# Altium PCB 遥控.PcbDoc
Units mil, origin at the board's own origin, x right, y up, seen from the top; angles counter-clockwise.
Board outline 1860.24 x 2647.64 mil, 2 copper layers (Top Layer, Bottom Layer); 26 components, 16 nets, 80 pads, 4 vias.
Unrouted connection lines stored in the file: 18.
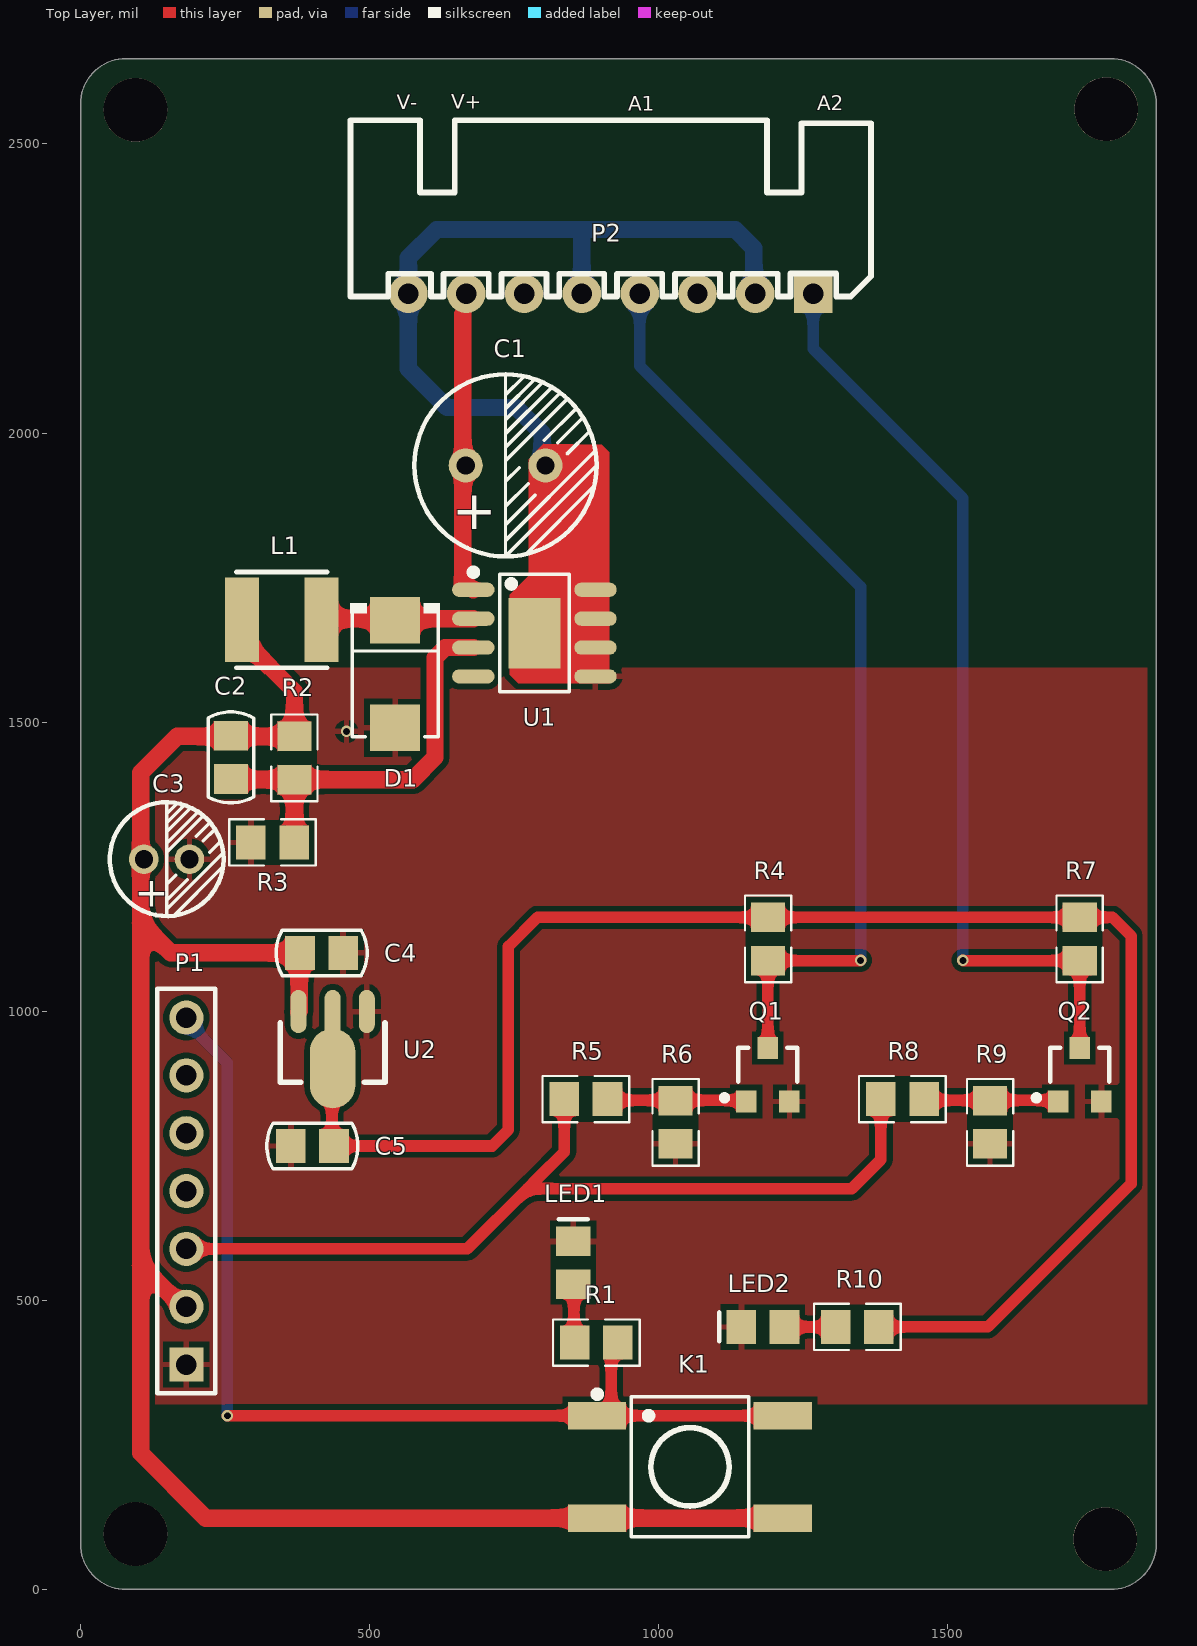
[diagram p0: Top Layer view]
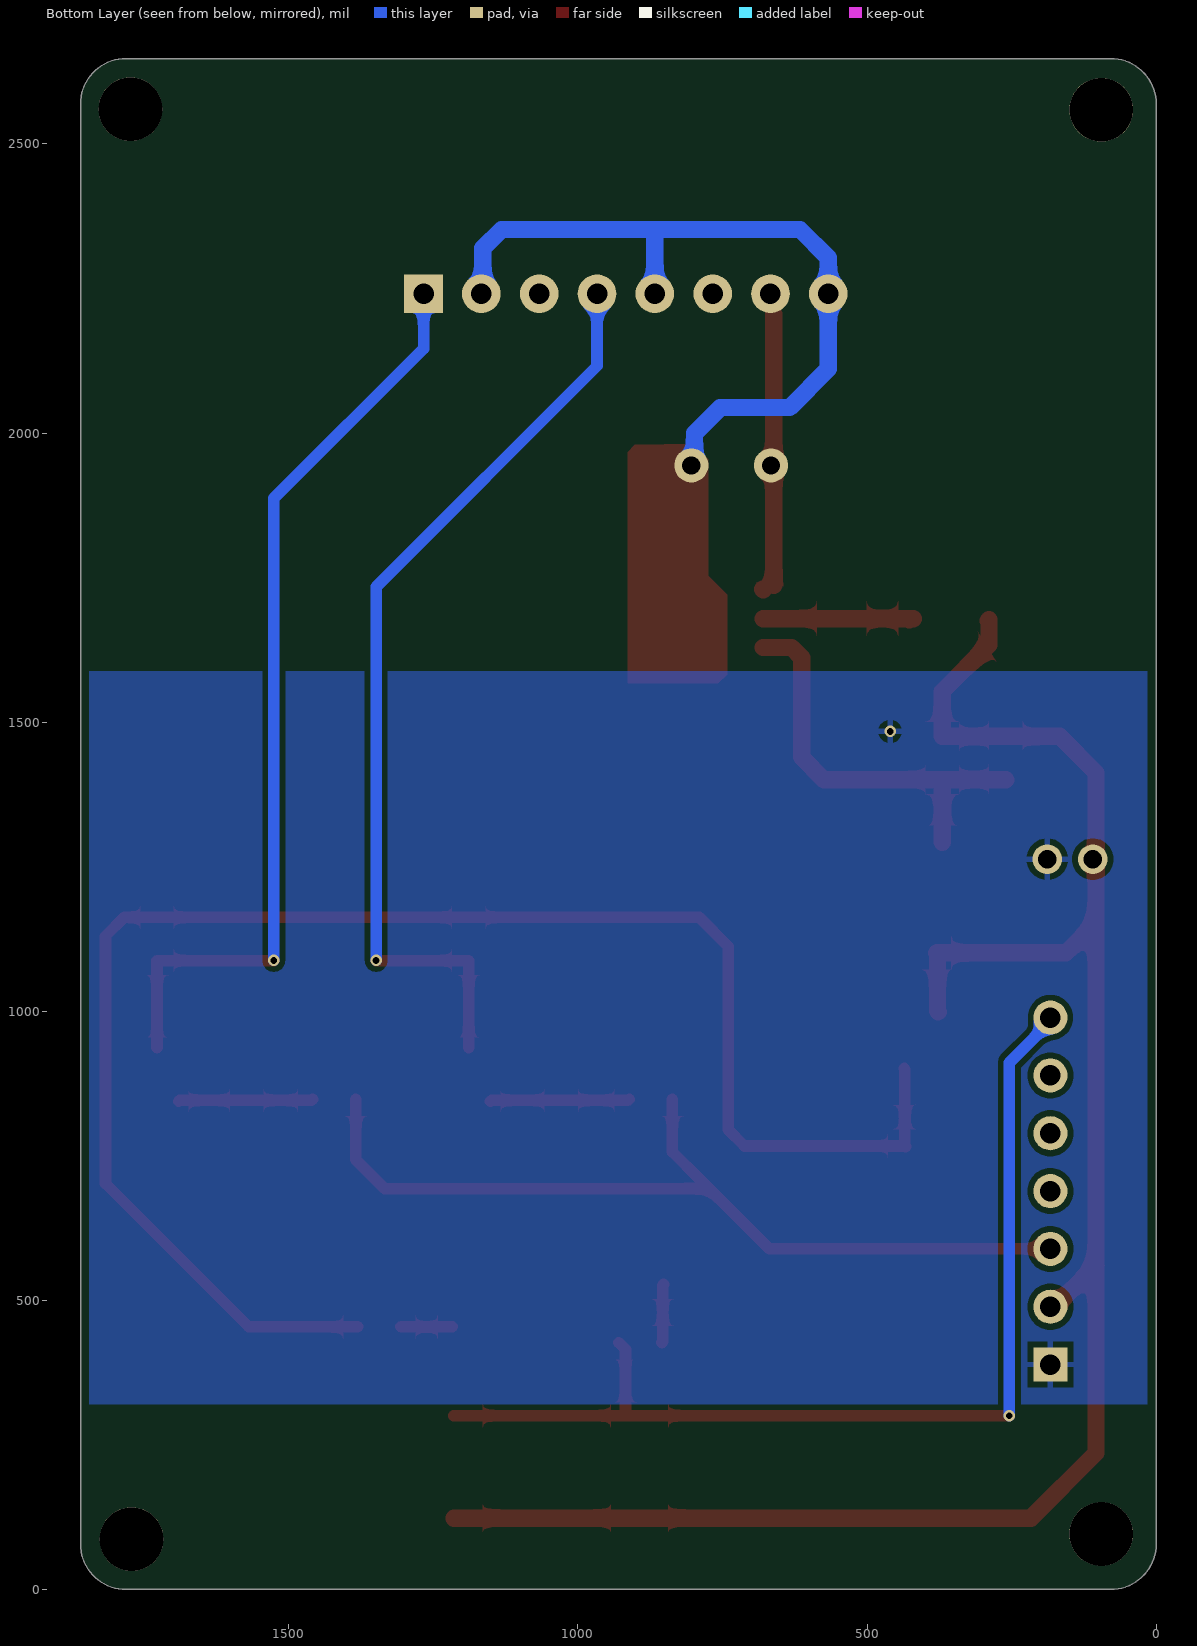
[diagram p1: Bottom Layer view, seen from below]
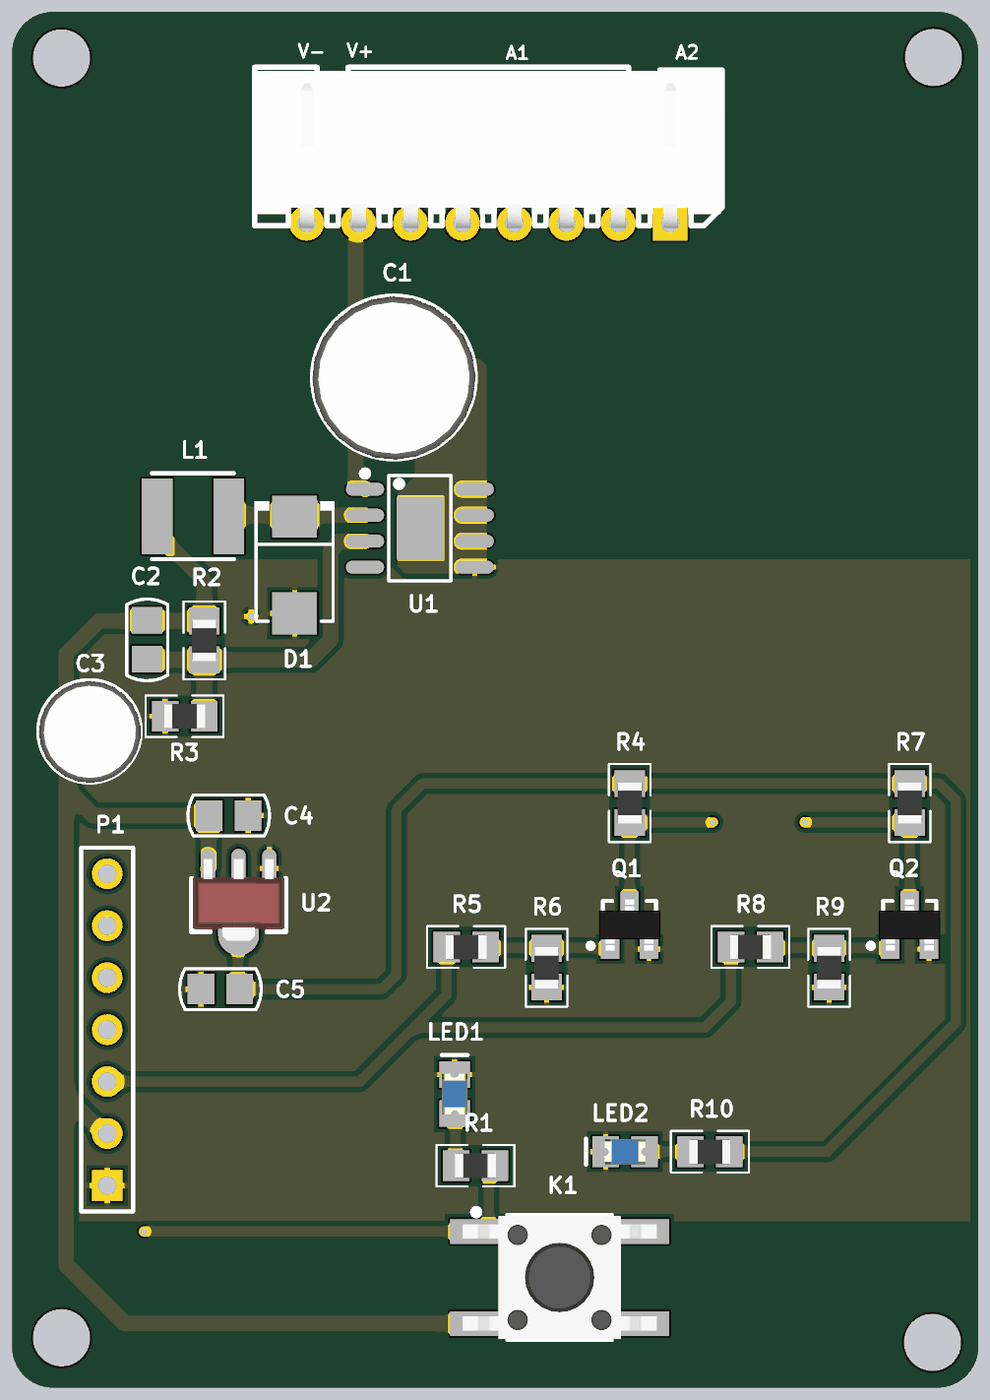
[diagram p2: 3D render of the assembled board from above, using the file's embedded part models]

## Layer stack, top to bottom
Top Solder: solder mask 0.4, Solder Resist, Dk 3.5
Top Layer: signal copper 1.4
Dielectric 1: dielectric 12.6, FR-4, Dk 4.8
Bottom Layer: signal copper 1.4
Bottom Solder: solder mask 0.4, Solder Resist, Dk 3.5

## Board outline
0,78.74 0,2568.9 cw(c78.74,2568.9) 78.74,2647.64 1781.5,2647.64 cw(c1781.5,2568.9) 1860.24,2568.9 1860.24,78.74 cw(c1781.5,78.74) 1781.5,0 78.74,0 cw(c78.74,78.74)

## Design rules (kind name [scope] priority, off if disabled: settings)
BoardOutlineClearance [All] p1: gap=15 ignorepadtopadclearanceinfootprint=FALSE
Clearance [All] p1: gap=10 ignorepadtopadclearanceinfootprint=FALSE except(0: Arc-Hole Track-Hole SMDPad-Hole THPad-Hole Via-Hole Fill-Hole Poly-Hole Region-Hole Text-Hole)
PolygonConnect [All] p1: connectstyle=Relief reliefconductorwidth=10 reliefentries=4 polygonreliefangle="90 Angle" airgapwidth=10
RoutingVias [All] p1: holewidth=11.81 width=19.68 viastyle="Through Hole" minholewidth=11.81 minwidth=19.68 maxholewidth=11.81 maxwidth=19.68
SolderMaskExpansion [All] p1: expansion=4 istentingtop=FALSE
Width [All] p1: maxlimit=50 minlimit=10 preferedwidth=10
30 further rules are at their usual default settings.

## Components (designator, comment, footprint, x,y, rotation, side; value= is the part's Value field where it differs from the comment)
C1 "33uF/100V" 25V330UF-ZC 735,1944 r0 top
C2 "33nF" CAP-0805 260,1439 r90 top
C3 "100uF/10V" 25V100UF-ZC 149,1263 r0 top
C4 "10uF" CAP-0805 417,1101 r180 top
C5 "10uF" CAP-0805 401,767 r0 top
D1 "S210" SMB_L4.6-W3.6-LS5.3-RD 544,1583 r270 top
K1 "SW-PB" SW-SMD_4P-L6.0-W6.0 1054,212 r0 top
L1 "47uH" IND-SMD_L4.0-W4.0_FNR4012S 348.1,1677 r0 top
LED1 "LED" LED_0805 852,565 r90 top
LED2 "LED" LED_0805 1180,454 r180 top
P1 "Header 7" HDR1X7 183,389 r90 top
P2 "Header 8" XH2.54-W-8P 917,2241 r180 top
Q1 "SS8050" SOT-23 1188.6,890.26 r0 top
Q2 "SS8050" SOT-23 1728,890.26 r0 top
R1 "1K" 0805 892,427 r0 top
R2 "10K" 0805 370,1438 r90 top
R3 "3.3K" 0805 332,1292 r180 top
R4 "4.7K" 0805 1189,1125 r270 top value=10K
R5 "1K" 0805 874,848 r0 top value=10K
R6 "10K" 0805 1029,808 r90 top
R7 "4.7K" 0805 1728,1125 r270 top value=10K
R8 "1K" 0805 1421.4,848 r0 top value=10K
R9 "10K" 0805 1573,808 r90 top
R10 "1K" 0805 1343.4,454 r0 top
U1 "XL7005A" SOIC-8_L4.9-W3.9-P1.27-LS6.0-BL-EP3.1-1 785,1654 r270 top
U2 "AMS1117-3.3" SOT89 435.99,950.2 r90 top

## Footprints (in the part's own frame and the unit in brackets; to place one, negate y for a bottom-side part, rotate by r counter-clockwise, add the part's x,y. Pads: shape width x height; smd on the part's side, far side on the other; paste and mask are expansions set on the pad)
25V100UF-ZC [mm] "25V100UF-直插电解电容"
  round 1.3 hole 0.8: 1(-1,0) 2(1,0)
  silkscreen extent -2.5,-2.5 2.5,2.5, body extent -2.48,-2.52 2.52,2.47, height 11.1
25V330UF-ZC [mm] "25V330UF-直插电解电容  D=8mm,内径5mm"
  round 1.5 hole 0.8: 1(-1.75,0) 2(1.75,0)
  silkscreen extent -4,-4 4,4, body extent -4,-4.03 4,3.97, height 11.6
0805 [mm] "贴片带丝印"
  rect 1.3x1.5 smd: 1(-0.95,0) 2(0.95,0)
  silkscreen extent -1.91,-1.02 1.91,1.02, body extent -1,-0.6 1,0.6, height 0.85
CAP-0805 [mm] "0805封装贴片电容"
  rect 1.3x1.5 smd: 1(-0.95,0) 2(0.95,0)
  silkscreen extent -2,-1 2,1, body extent -1.27,-0.64 1.27,0.64, height 0.9
HDR1X7 [mm] "Connector; Header; 7 Position"
  rect 1.5x1.5 hole 0.9: 1(0,0)
  round 1.5 hole 0.9: 2(2.54,0) 3(5.08,0) 4(7.62,0) 5(10.16,0) 6(12.7,0) 7(15.24,0)
  silkscreen extent -1.27,-1.27 16.51,1.27
IND-SMD_L4.0-W4.0_FNR4012S [mm]
  rect 1.5x3.7 smd: 1(-1.75,0) 2(1.75,0)
  silkscreen extent -2,-2.1 2,2.1
LED_0805 [mm] "贴片二极管"
  rect 1.3x1.5 smd: 1(-0.95,0) 2(0.95,0)
  silkscreen extent 1.91,-0.63 1.91,0.64, body extent -1.01,-0.62 1.01,0.62, height 1.1
SMB_L4.6-W3.6-LS5.3-RD [mil]
  rect 80.61x86.31 smd: 1(-92.94,0) 2(92.94,0)
  silkscreen extent -123,-77 108,77
SOIC-8_L4.9-W3.9-P1.27-LS6.0-BL-EP3.1-1 [mm]
  oval 0.63x1.865 smd: 1(-1.905,-2.683) 2(-0.635,-2.683) 3(0.635,-2.683) 4(1.905,-2.683) 5(1.905,2.682) 6(0.635,2.682) 7(-0.635,2.682) 8(-1.905,2.682)
  rect 3.1x2.3 smd paste+0 mask+0.05: 9(0,0)
  silkscreen extent -2.82,-2.83 2.58,1.52
SOT89 [mm] "SOT89封装"
  oval 1.9x0.7 smd: 1(1.25,-1.5) 3(1.25,1.5)
  oval 3.5x2 smd: 2(-1.25,0)
  oval 2.1x0.7 smd: 2(1.151,0)
  silkscreen extent -1.85,-2.3 0.75,2.3, body extent -2.3,-2.25 1.7,2.25, height 1.5
SOT-23 [mm]
  rect 0.9x0.95 smd: 1(-0.95,-1.175) 2(0.95,-1.175) 3(0,1.175)
  silkscreen extent -2.03,-1.14 1.3,1.18, body extent -1.5,-1.25 1.5,1.25, height 1.15
SW-SMD_4P-L6.0-W6.0 [mm]
  rect 2.55x1.2 smd: 1(-4.075,2.25) 1(4.075,2.25) 2(-4.075,-2.25) 2(4.075,-2.25)
  silkscreen extent -4.22,-3.08 2.57,3.34, body extent -4.75,-3 4.75,3, height 7.42
XH2.54-W-8P [mm] "接插件，8P"
  rect 1.7x1.7 hole 0.9: 1(-8.89,0)
  round 1.7 hole 0.9: 2(-6.35,0) 3(-3.81,0) 4(-1.27,0) 5(1.27,0) 6(3.81,0) 7(6.35,0) 8(8.89,0)
  silkscreen extent -11.43,-7.62 11.43,0.13, body extent -11.4,-7.45 11.38,0.25, height 2.89

## Part data
C1 C3: library part 470uF, Manufacturer=ValuePro, Manufacturer Part="470uF 35V 10*15Green high frequency", nameAlias=Capacitance, spicePre=C, spiceSymbolName="470uF 35V 10*15Green high frequency", Supplier=LCSC, Supplier Part=C45081
C2 C4 C5: library part Cap, "无极性电容", LatestRevisionDate=17-Jul-2002, LatestRevisionNote="Re-released for DXP Platform.", PackageReference=RAD-0.3, Published=8-Jun-2000, Publisher="Altium Limited"
D1: library part B340A, LCSC Assembly=Yes, Manufacturer=MDD, image=//image.lceda.cn/szlcsc/C64982.jpg, Manufacturer Part=B340A, SMT Type=Extend, spicePre=D, spiceSymbolName=B340A, Supplier=LCSC, Supplier Part=C64982
K1: "微动开关", LatestRevisionDate=17-Jul-2002, LatestRevisionNote="Re-released for DXP Platform.", PackageReference=SPST-2, Published=24-Mar-1999, Publisher="Altium Limited", Suppliter Part=C961737
L1: library part 68uH, Manufacturer=SXN, Manufacturer Part=SMDRI127-680MT, nameAlias=Inductance, spicePre=L, spiceSymbolName=SMDRI127-680MT, Supplier=LCSC, Supplier Part=C9907
LED1 LED2: "发光二极管", LatestRevisionDate=08-Jul-2005, LatestRevisionNote="Mech Layer 1 removed.", PackageReference=LED-0, Published=8-Jun-2000, Publisher="Altium Limited"
P1: "Header, 7-Pin", LatestRevisionDate=17-Jul-2002, LatestRevisionNote="Re-released for DXP Platform.", Publisher="Altium Limited"
P2: "Header, 8-Pin", LatestRevisionDate=17-Jul-2002, LatestRevisionNote="Re-released for DXP Platform.", Publisher="Altium Limited"
Q1 Q2: "NPN贴片三极管", PackageDocument=Sep-1998, Code_JEDEC=TO-92A, ComponentLink1Description="Manufacturer Link", ComponentLink1URL=http://www.fairchildsemi.com/, ComponentLink2Description=Datasheet, ComponentLink2URL=http://www.fairchildsemi.com/ds/2N%2F2N3904.pdf, DatasheetDocument=1997, LatestRevisionDate=15-Jan-2003, LatestRevisionNote="PCB Footprint 'BCY-W3/D4.7' replaced", PackageReference=TO-92A, Published=8-Jun-2000, Publisher="Altium Limited"
R1 R4 R5 R6 R7 R8 R9 R10: library part Res, "贴片电阻", LatestRevisionDate=17-Jul-2002, LatestRevisionNote="Re-released for DXP Platform.", PackageReference=AXIAL-0.4, Published=8-Jun-2000, Publisher="Altium Limited"
R2: library part 1K, LCSC Assembly=Yes, Manufacturer=UniOhm, Manufacturer Part=0603WAF1001T5E, nameAlias="Resistance (Ohms)", SMT Type=Basic, spicePre=R, spiceSymbolName=0603WAF1001T5E, Supplier=LCSC, Supplier Part=C21190
R3: library part 3K, LCSC Assembly=Yes, Manufacturer=UniOhm, Manufacturer Part=0603WAF3001T5E, nameAlias="Resistance (Ohms)", SMT Type=Basic, spicePre=R, spiceSymbolName=0603WAF3001T5E, Supplier=LCSC, Supplier Part=C4211
U1: Frequency - Switching=150kHz, JLCPCB Part Class="Extended Part", LCSC Part Name="0.4A 150kHz 80V 降压型DC-DC转换器", Manufacturer=XLSEMI(芯龙), Operating Temperature=-40℃~+125℃@(TJ), Output Current=400mA, Output Voltage=1.25V~20V, Quiescent Current=2.5mA, Voltage - Supply=5V~80V, Add into BOM=yes, Convert to PCB=yes, Datasheet=https://atta.szlcsc.com/upload/public/pdf/source/20150821/1457707346919.pdf, Device=XL7005A, Function=降压型, Manufacturer Part=XL7005A, Number of Outputs=1, Output Type=可调, Supplier=LCSC, Supplier Footprint=SOIC-8-EP, Supplier Part=C50848, Switch tube (built-in/external)=内置, Symbol=XL7005A, Synchronous Rectifier=否, Topology=降压式
U2: library part AMS1117, "3.3V稳压芯片"

## Free pads (board coordinates)
  round 110.24 hole 110.24 unplated: 0(95,96) 0(95,2559) 0(1772,87) 0(1774,2560)

## Via types
v1: diameter 19.68, hole 11.81, Top Layer to Bottom Layer, 4 vias

## Nets (pads, with @x,y where several pads share a name; then routed paths per layer and width w, separated by ;. In a path a pad name is that pad's centre, name@x,y a point inside that pad or via, vN(x,y) a via of type N, cw(c..) or ccw(c..) an arc to the next point about the centre after c; other vN are vias at no path point)
+3.3V: C5.2 R4.1 R7.1 R10.2 U2.2 | length 2844.5
  Top Layer w20: C5.2@433.4,766 434.7,767.3 434.7,899.7 U2.2@436,901 ; C5.2 712,767 740,795 740,1112 790.4,1162.4 R4.1 R7.1 1784.6,1162.4 1817,1130 1817,702 1569,454 R10.2
+5V: C2.2 C3.1 C4.2 K1.2 L1.1 P1.2 R2.2 U2.3 | length 3372.8
  Top Layer w30: P1.2@182,483 104,561 ; L1.1@290.6,1675.6 289.2,1677 289.2,1633.69 370,1552.9 R2.2 167,1475.4 104,1412.4 104,1153 ; U2.3 378.17,1000.62 378.17,1099.57 C4.2 156,1101 104,1153 ; K1.2@1214.43,123.42 893.57,123.42 216.58,123.42 104,236 104,561 ; 104,561 104,1153
A1: P2.4 Q1.3 R4.2 | length 1622.6
  Top Layer w20: Q1.3 1188.8,936.72 1188.8,1087.4 R4.2 1348.6,1087.6 v1(1349,1088)
  Bottom Layer w20: P2.4 967,2116 1349,1734 1349,1661 v1(1349,1088)
A2: P2.1 Q2.3 R7.2 | length 1613.5
  Top Layer w20: v1(1526,1088) 1526.4,1087.6 R7.2 Q2.3
  Bottom Layer w20: P2.1 1267,2146 1526,1887 v1(1526,1088)
D0_5V: P1.3 R5.1 R8.1 | length 1551.1
  Top Layer w20: P1.3 669,589 773,693 ; R5.1 836.6,756.6 791,711 773,693 ; R8.1 1384,743 1334,693 773,693
GND: C1.2 C3.2 C4.1 C5.1 D1.2 LED1.2 LED2.2 P1.1 P2.2 P2.5 P2.8 Q1.2 Q2.2 R3.2 R6.1 R9.1 U1.5 U1.6 U1.7 U1.8 U1.9 U2.1 | length 1339.5
  Top Layer w30: C1.2@818.9,1948 C1.2@818.9,1955.86
  Bottom Layer w30: C1.2 798.34,1949.56 798.34,1999.66 754,2044 634,2044 567,2111 567,2303 616,2352 884.57,2352 1132,2352 1164.54,2319.46 1164.54,2243.46 P2.2 ; P2.5 867,2334.43
  other v1: 460,1484
NC1: P2.6
NC2: P2.3
NetC2_1: C2.1 R2.1 R3.1 U1.3 | length 733.8
  Top Layer w30: C2.1@260,1400.6 R2.1 369.7,1400.3 369.7,1292.3 R3.1 ; R2.1@360,1400.6 574.6,1400.6 613,1439 613,1611.43 630.57,1629 U1.3
NetD1_1: D1.1 L1.2 U1.2 | length 262.2
  Top Layer w30: L1.2@420,1679 U1.2 ; L1.2@427,1677 L1.2@429,1679
NetLED1_1: LED1.1 R1.1 | length 101.7
  Top Layer w20: LED1.1 853.3,526.3 853.3,428.3 R1.1
NetLED2_1: LED2.1 R10.1 | length 88.6
  Top Layer w20: LED2.1 R10.1
NetQ1_1: Q1.1 R5.2 R6.2 | length 241.5
  Top Layer w20: R5.2 913.4,846 1149.2,846 Q1.1
NetQ2_1: Q2.1 R8.2 R9.2 | length 233.5
  Top Layer w20: R8.2 1460.8,846 1688.6,846 Q2.1
V+: C1.1 P2.7 U1.1 | length 477.7
  Top Layer w30: U1.1@661.24,1736.86 661.24,1948 661.24,2205.24 ; P2.7@661.24,2235.24 P2.7 ; U1.1 U1.1@680.24,1729.86
VT: K1.1 P1.7 R1.2 | length 1805.4
  Top Layer w20: v1(253.97,300.35) 254.2,300.58 893.57,300.58 917.78,300.58 917.78,415.38 R1.2 ; K1.1@920.14,300.58 K1.1@1214.43,300.58
  Bottom Layer w20: P1.7@179.5,985.5 253.97,911.03 v1(253.97,300.35)
pads on no net: P1.4 P1.5 P1.6 U1.4

## Polygon pours and split planes (outlines as drawn)
GND on Bottom Layer "GND_L02_P000" (solid, pour order 0): -12.65,1588 2192,1588 2192,454 2058,320 -25.07,320
GND on Top Layer "GND_L01_P001" (solid, remove dead copper, pour order 1): 3.89,320 1959,320 1959,1594 1.69,1594

## Other copper
Top Layer:
  region net GND: 801,1981 775,1955 775,1753 742,1720 742,1582 757,1567 914,1567 914,1967 901.52,1979.48

## Silkscreen, mask and mechanical layers (free items; w line width, h text height)
Top Overlay:
  text "V+" at 641,2561 h25
  text "V-" at 547,2560 h25
  text "A2" at 1274,2558 h25
  text "A1" at 947,2557 h25
Mechanical 1:
  the board outline again, w10

## Text inside footprints (layer, text, board x,y; h text height)
C1: Top Overlay "+" at 642.48,1833.76 h66.93
C3: Top Overlay "+" at 93.88,1180.32 h51.18